# Altium PCB PCB.PcbDoc (part 5 of 6)
Units mm, origin at the board's own origin, x right, y up, seen from the top; angles counter-clockwise.
Board outline 190 x 64 mm, 6 copper layers (SIG 1, GND 1, SIG 2, PWR, GND 2, SIG 3), stack 1.565 mm thick; 489 components, 387 nets, 1828 pads, 1817 vias.
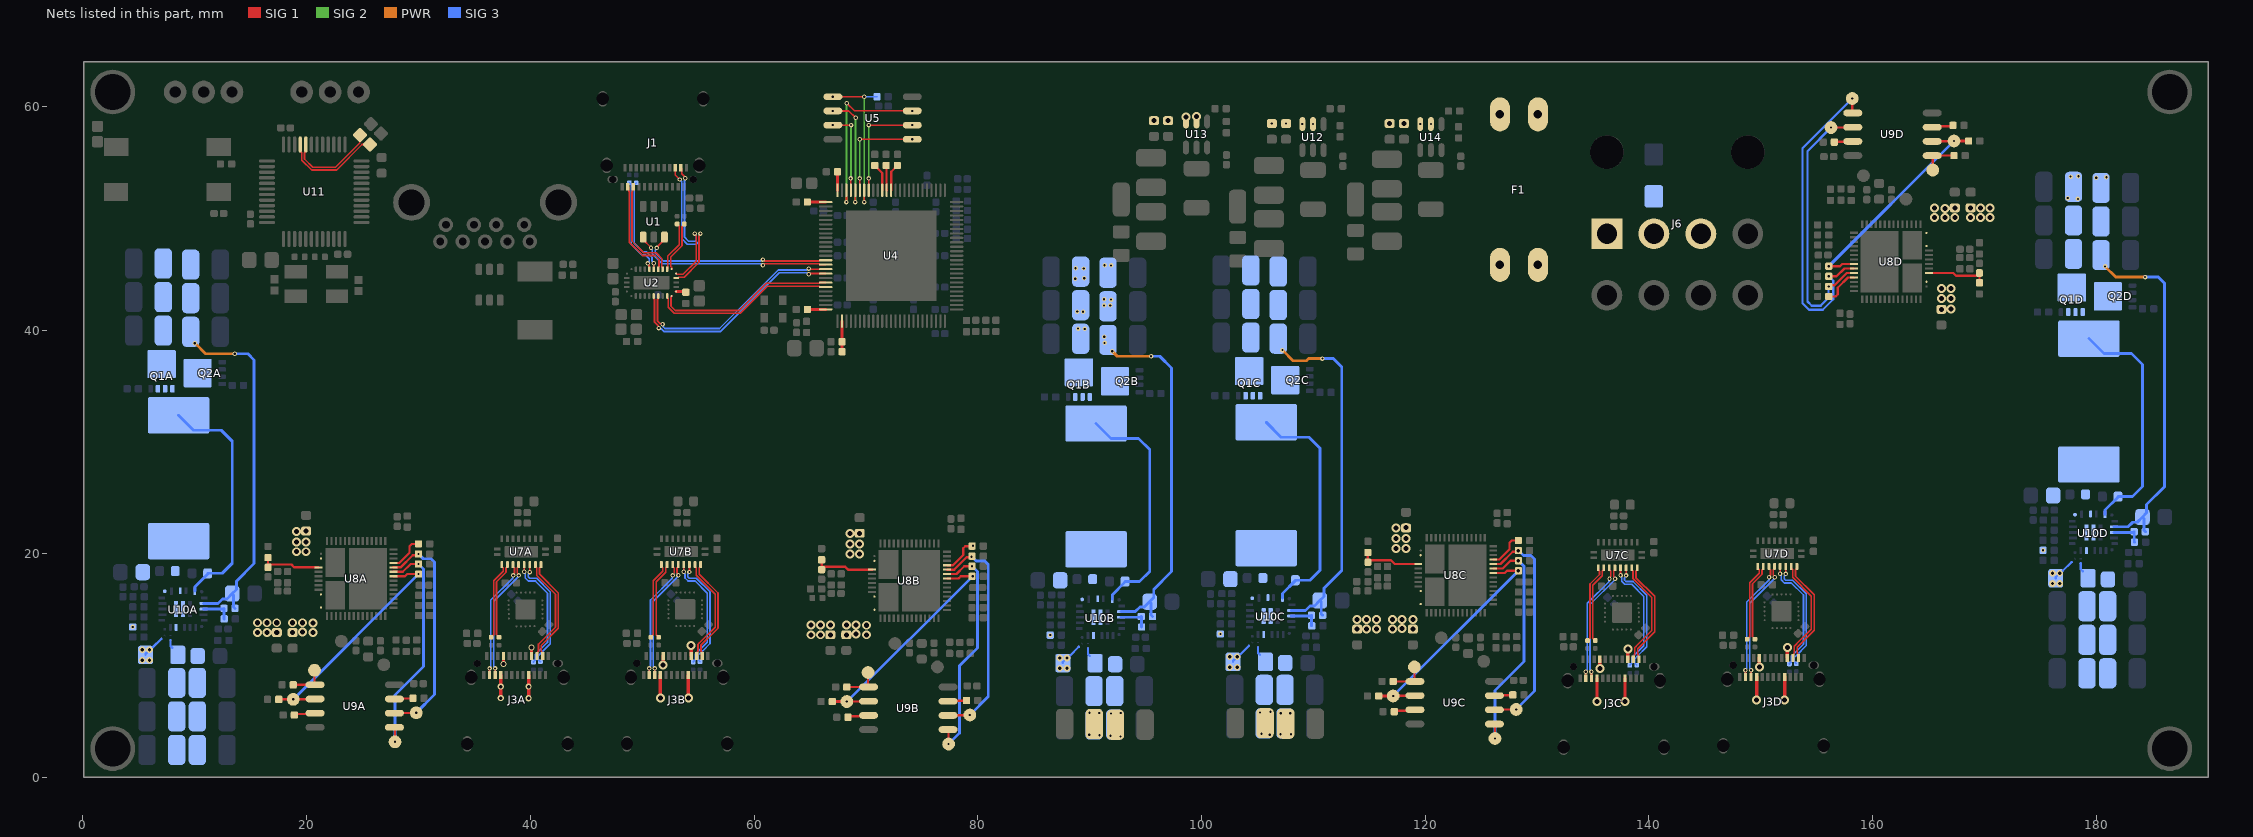
[diagram p9: the nets of this part, all layers, seen from the top]

## Via types
v1: diameter 0.4, hole 0.2, SIG 1 to SIG 3, tented both sides, 1364 vias
v2: diameter 0.6, hole 0.3, SIG 1 to SIG 3, tented both sides, 196 vias
v3: diameter 0.5, hole 0.2, SIG 1 to SIG 3, 130 vias
v4: diameter 0.8, hole 0.45, SIG 1 to SIG 3, tented both sides, 102 vias
v5: diameter 0.5, hole 0.25, SIG 1 to SIG 3, tented both sides, 14 vias
v6: diameter 0.5, hole 0.3, SIG 1 to SIG 3, tented both sides, 5 vias
v7: diameter 0.55, hole 0.3, SIG 1 to SIG 3, tented both sides, 4 vias
v8: diameter 0.55, hole 0.35, SIG 1 to SIG 3, tented both sides, 2 vias

## Nets (pads, with @x,y where several pads share a name; then routed paths per layer and width w, separated by ;. In a path a pad name is that pad's centre, name@x,y a point inside that pad or via, vN(x,y) a via of type N, cw(c..) or ccw(c..) an arc to the next point about the centre after c; other vN are vias at no path point) (continued)
PPHVA: C46A.1 NT1A.2 R60A.2 R61A.1 U8A.11-12 | length 1.7
  SIG 3 w0.203: R60A.2@5.583,10.973 5.583,11.058 v2(5.95,11.425) ; R60A.2@6.223,11.635 NT1A.2@7.013,12.425
  other v1: 4.451,13.472
  other v2: 5.3,10.5 5.95,10.5 5.3,11.425
  other v4: 15.6,12.975 16.45,12.975 17.325,12.975 15.6,13.85 16.45,13.85 17.325,13.85
PPHVB: C46B.1 NT1B.2 R60B.2 R61B.1 U8B.11-12 | length 1.7
  SIG 3 w0.203: R60B.2@87.613,10.243 87.613,10.328 v2(87.98,10.695) ; R60B.2@88.252,10.905 NT1B.2@89.043,11.695
  other v1: 86.481,12.743
  other v2: 87.33,9.77 87.98,9.77 87.33,10.695
  other v4: 65.1,12.775 65.95,12.775 66.825,12.775 65.1,13.65 65.95,13.65 66.825,13.65
PPHVC: C46C.1 NT1C.2 R60C.2 R61C.1 U8C.11-12 | length 1.7
  SIG 3 w0.203: R60C.2@102.831,10.351 102.831,10.435 v2(103.199,10.803) ; R60C.2@103.471,11.012 NT1C.2@104.261,11.802
  other v1: 101.7,12.85
  other v2: 102.549,9.878 103.199,9.878 102.549,10.803
  other v4: 113.933,13.275 114.783,13.275 115.658,13.275 113.933,14.15 114.783,14.15 115.658,14.15
PPHVD: C46D.1 NT1D.2 R60D.2 R61D.1 U8D.11-12 | length 1.7
  SIG 3 w0.203: R60D.2@176.393,17.828 176.393,17.913 v2(176.76,18.28) ; R60D.2@177.033,18.49 NT1D.2@177.823,19.28
  other v1: 175.261,20.328
  other v2: 176.11,17.355 176.76,17.355 176.11,18.28
  other v4: 168.792,50.075 169.667,50.075 170.517,50.075 168.792,50.95 169.667,50.95 170.517,50.95
RBIAS: R17.1 U4.100 | length 1.6
  SIG 1 w0.25: R17.1@64.775,41.869 U4.100@66.411,41.869
REG_VCCA: C69A.1 U10A.19
REG_VCCB: C69B.1 U10B.19
REG_VCCC: C69C.1 U10C.19
REG_VCCD: C69D.1 U10D.19
S_I2C_CLK: R27.1 U4.75 | length 1.7
  SIG 1 w0.25: U4.75@67.462,52.52 R27.1@67.462,54.175
S_I2C_DATA: R30.1 U4.76 | length 1.6
  SIG 1 w0.25: R30.1@64.775,51.469 U4.76@66.411,51.469
SPI_CE_N: R20.1 U4.69 U5.1 | length 14.5
  SIG 1 w0.15: U5.1@67.025,60.91 v1(67.05,60.885) v1(69.862,60.885) ; v1(69.862,51.461) U4.69@69.862,52.52
  SIG 2 w0.15: v1(69.862,51.461) v1(69.862,60.885)
  SIG 3 w0.15: v1(69.862,60.885) R20.1@71,60.885
SPI_CLK: U4.68 U5.6 | length 9.7
  SIG 1 w0.15: U4.68@70.262,52.52 v1(70.262,53.579) ; v1(70.262,58.345) v1(74.15,58.345)
  SIG 2 w0.15: v1(70.262,53.579) v1(70.262,58.345)
SPI_CLKA: R48A.1 TP5A.0 U8A.38 U9A.6 | length 20.6
  SIG 1 w0.203: U8A.38@27.75,18.8 28.4,18.8 29.496,19.896 29.896,19.896 v1(30,20) ; U9A.6@27.85,5.765 27.868,5.783 29.782,5.783 v1(29.8,5.8)
  SIG 3 w0.25: v1(29.8,5.8) 31.425,7.425 31.425,19.276 31.126,19.575 30.425,19.575 v1(30,20)
SPI_CLKB: R48B.1 TP5B.0 U8B.38 U9B.6 | length 20.6
  SIG 1 w0.203: U8B.38@77.25,18.6 77.9,18.6 78.996,19.696 79.396,19.696 v1(79.448,19.748) R48B.1@79.5,19.8 ; U9B.6@77.35,5.565 77.368,5.582 79.282,5.582 v1(79.3,5.6)
  SIG 3 w0.25: v1(79.3,5.6) 80.94,7.24 80.94,19.061 80.635,19.366 79.871,19.366 79.489,19.748 v1(79.448,19.748)
SPI_CLKC: R48C.1 TP5C.0 U8C.38 U9C.6 | length 20.6
  SIG 1 w0.203: U8C.38@126.1,19.1 126.75,19.1 127.846,20.196 128.246,20.196 v6(128.35,20.3) ; U9C.6@126.2,6.065 126.217,6.082 128.132,6.082 v1(128.15,6.1)
  SIG 3 w0.25: v1(128.15,6.1) 129.79,7.74 129.79,19.561 129.476,19.875 128.809,19.875 128.384,20.3 v6(128.35,20.3)
SPI_CLKD: R48D.1 TP5D.0 U8D.38 U9D.6 | length 24.5
  SIG 1 w0.203: v1(156.1,43.925) 156.204,44.029 156.604,44.029 157.7,45.125 U8D.38@158.35,45.125 ; v1(156.3,58.125) 156.318,58.143 158.233,58.142 U9D.6@158.25,58.16
  SIG 3 w0.203: v1(156.1,43.925) 156.075,43.9 156.075,42.9 155.372,42.197 154.578,42.197 154.193,42.582 154.193,56.018 v1(156.3,58.125)
SPI_CSnA: R54A.2 TP3A.0 U9A.1 | length 3.3
  SIG 1 w0.203: R54A.2@18.8,8.3 18.802,8.303 20.747,8.303 U9A.1@20.75,8.305 20.7,8.355 TP3A.0@20.7,9.6
SPI_CSnB: R54B.2 TP3B.0 U9B.1 | length 3.3
  SIG 1 w0.203: R54B.2@68.3,8.1 68.302,8.102 70.247,8.102 U9B.1@70.25,8.105 70.2,8.155 TP3B.0@70.2,9.4
SPI_CSnC: R54C.2 TP3C.0 U9C.1 | length 3.3
  SIG 1 w0.203: R54C.2@117.15,8.6 117.152,8.602 119.097,8.602 U9C.1@119.1,8.605 119.05,8.655 TP3C.0@119.05,9.9
SPI_CSnD: R54D.2 TP3D.0 U9D.1 | length 3.3
  SIG 1 w0.203: TP3D.0@165.4,54.325 165.4,55.57 U9D.1@165.35,55.62 165.353,55.623 167.298,55.622 R54D.2@167.3,55.625
SPI_D0: U4.70 U5.5 | length 9.2
  SIG 1 w0.15: U4.70@69.462,52.52 v1(69.462,53.579) ; v1(69.462,57.075) v1(74.15,57.075)
  SIG 2 w0.15: v1(69.462,53.579) v1(69.462,57.075)
SPI_D1: U4.71 U5.2 | length 10.9
  SIG 1 w0.15: v1(67.05,59.615) 68.485,59.615 v1(69.1,59) ; v1(69.062,51.461) U4.71@69.062,52.52
  SIG 2 w0.15: v1@69.054,51.469 69.081,51.496 69.081,58.981 v1(69.1,59)
SPI_D2: U4.72 U5.3 | length 7.5
  SIG 1 w0.15: v1(67.05,58.345) v1(68.679,58.345) ; v1(68.637,53.579) 68.654,53.562 68.654,52.528 U4.72@68.662,52.52
  SIG 2 w0.15: v1(68.637,53.579) 68.669,53.611 v1@68.669,58.345
SPI_D3: U4.73 U5.7 | length 16
  SIG 1 w0.15: v1(68.262,51.461) U4.73@68.262,52.52 ; v1(68.3,60.3) 68.98,59.62 v1(74.145,59.62)
  SIG 2 w0.15: v1(68.262,51.461) 68.262,60.262 v1(68.3,60.3)
SPI_HOLDA: R55A.2 U9A.7 | length 1.7
  SIG 1 w0.203: U9A.7@27.85,7.035 27.882,7.067 29.467,7.067 R55A.2@29.5,7.1
SPI_HOLDB: R55B.2 U9B.7 | length 1.7
  SIG 1 w0.203: U9B.7@77.35,6.835 77.382,6.867 78.967,6.867 R55B.2@79,6.9
SPI_HOLDC: R55C.2 U9C.7 | length 1.7
  SIG 1 w0.203: U9C.7@126.2,7.335 126.232,7.367 127.817,7.367 R55C.2@127.85,7.4
SPI_HOLDD: R55D.2 U9D.7 | length 1.7
  SIG 1 w0.203: R55D.2@156.6,56.825 156.633,56.858 158.218,56.858 U9D.7@158.25,56.89
SPI_MISOA: R47A.1 R53A.2 TP4A.0 U8A.36 U9A.2 | length 21.4
  SIG 1 w0.203: v1(18.8,7) 18.817,7.017 20.732,7.017 U9A.2@20.75,7.035 ; U8A.36@27.75,18 28.787,18 28.987,18.2 v1(30,18.2)
  SIG 1 w0.25: R53A.2@17.5,7 v1(18.8,7)
  SIG 3 w0.25: v1(18.8,7) v1(30,18.2)
SPI_MISOB: R47B.1 R53B.2 TP4B.0 U8B.36 U9B.2 | length 21.5
  SIG 1 w0.203: v1(68.3,6.8) 68.317,6.817 70.232,6.817 U9B.2@70.25,6.835 ; U8B.36@77.25,17.8 78.287,17.8 78.487,18 R47B.1@79.5,18
  SIG 1 w0.25: R53B.2@67,6.8 v1(68.3,6.8)
  SIG 3 w0.25: v1(68.3,6.8) 68.325,6.8 79.525,18 v1(79.55,18)
SPI_MISOC: R47C.1 R53C.2 TP4C.0 U8C.36 U9C.2 | length 21.4
  SIG 1 w0.203: v1(117.15,7.3) 117.167,7.317 119.082,7.317 U9C.2@119.1,7.335 ; U8C.36@126.1,18.3 127.137,18.3 127.337,18.5 v6(128.35,18.5)
  SIG 1 w0.25: R53C.2@115.85,7.3 v1(117.15,7.3)
  SIG 3 w0.25: v1(117.15,7.3) v6(128.35,18.5)
SPI_MISOD: R47D.1 R53D.2 TP4D.0 U8D.36 U9D.2 | length 21.4
  SIG 1 w0.203: v1(156.1,45.725) 157.113,45.725 157.313,45.925 U8D.36@158.35,45.925 ; U9D.2@165.35,56.89 165.368,56.908 167.283,56.908 v1(167.3,56.925)
  SIG 1 w0.25: v1(167.3,56.925) R53D.2@168.6,56.925
  SIG 3 w0.25: v1(156.1,45.725) v1(167.3,56.925)
SPI_MOSIA: R46A.1 TP6A.0 U8A.37 U9A.5 | length 21
  SIG 1 w0.203: U8A.37@27.75,18.4 28.6,18.4 29.3,19.1 v1(30,19.1) ; U9A.5@27.85,4.495 27.9,4.445 v1(27.9,3.2)
  SIG 3 w0.25: v1(27.9,3.2) 27.9,7.4 30.45,9.95 30.45,18.65 v1(30,19.1)
SPI_MOSIB: R46B.1 TP6B.0 U8B.37 U9B.5 | length 21
  SIG 1 w0.203: U8B.37@77.25,18.2 78.1,18.2 78.8,18.9 v1(79.5,18.9) ; U9B.5@77.35,4.295 77.4,4.245 v1(77.4,3)
  SIG 3 w0.25: v1(77.4,3) 78.375,3.975 78.375,10 79.975,11.6 79.975,18.425 v1(79.5,18.9)
SPI_MOSIC: R46C.1 TP6C.0 U8C.37 U9C.5 | length 21
  SIG 1 w0.203: U8C.37@126.1,18.7 126.95,18.7 127.65,19.4 v6(128.35,19.4) ; U9C.5@126.2,4.795 126.25,4.745 v1(126.25,3.5)
  SIG 3 w0.25: v1(126.25,3.5) 126.25,7.8 128.85,10.4 128.85,18.9 v6(128.35,19.4)
SPI_MOSID: R46D.1 TP6D.0 U8D.37 U9D.5 | length 29.6
  SIG 1 w0.203: v1(156.1,44.825) 156.8,44.825 157.5,45.525 U8D.37@158.35,45.525 ; v1(158.2,60.725) 158.2,59.48 U9D.5@158.25,59.43
  SIG 3 w0.203: v1(156.1,44.825) 156.502,44.423 156.502,42.777 155.559,41.834 154.341,41.834 153.75,42.425 153.75,56.275 v1(158.2,60.725)
SPI_SSA: R45A.1 U8A.39 | length 3.3
  SIG 1 w0.203: U8A.39@27.75,19.2 27.752,19.202 28.287,19.202 29.2,20.115 29.2,20.7 29.4,20.9 R45A.1@30,20.9
SPI_SSB: R45B.1 U8B.39 | length 3.3
  SIG 1 w0.203: U8B.39@77.25,19 77.252,19.002 77.787,19.002 78.7,19.915 78.7,20.5 78.9,20.7 R45B.1@79.5,20.7
  other v1: 79.575,20.725
SPI_SSC: R45C.1 U8C.39 | length 3.3
  SIG 1 w0.203: U8C.39@126.1,19.5 126.102,19.502 126.637,19.502 127.55,20.415 127.55,21 127.75,21.2 R45C.1@128.35,21.2
SPI_SSD: R45D.1 U8D.39 | length 3.3
  SIG 1 w0.203: R45D.1@156.1,43.025 156.7,43.025 156.9,43.225 156.9,43.81 157.813,44.723 158.348,44.723 U8D.39@158.35,44.725
SPI_WPA: R52A.2 U9A.3 | length 1.9
  SIG 1 w0.203: R52A.2@18.9,5.6 18.989,5.689 20.674,5.689 U9A.3@20.75,5.765
SPI_WPB: R52B.2 U9B.3 | length 1.9
  SIG 1 w0.203: R52B.2@68.4,5.4 68.489,5.489 70.174,5.489 U9B.3@70.25,5.565
SPI_WPC: R52C.2 U9C.3 | length 1.9
  SIG 1 w0.203: R52C.2@117.25,5.9 117.339,5.989 119.024,5.989 U9C.3@119.1,6.065
SPI_WPD: R52D.2 U9D.3 | length 1.9
  SIG 1 w0.203: U9D.3@165.35,58.16 165.426,58.236 167.111,58.236 R52D.2@167.2,58.325
ST_USB2_D_N: R79.2 U11.32 | length 8.2
  SIG 1 w0.152: U11.32@19.925,56.614 19.925,56.001 19.8,55.876 19.8,55.318 20.542,54.575 22.575,54.575 24.753,56.753 24.753,57.453 R79.2@24.766,57.466
ST_USB2_D_P: R80.2 U11.33 | length 8.9
  SIG 1 w0.152: U11.33@19.425,56.614 19.425,56.008 19.558,55.876 19.558,55.217 20.442,54.333 22.676,54.333 24.949,56.606 25.656,56.606 R80.2@25.666,56.616
SW1A: C60A.2 L1A.1 Q1A.1 Q1A.2 Q1A.3 Q2A.5-6-7-8 U10A.23 | length 21.3
  SIG 3 w0.254: L1A.1@8.551,32.397 9.887,31.062 12.362,31.062 13.351,30.072 13.351,19.172 12.451,18.272 C60A.2@11.151,18.272 11.151,18.222 10.003,17.074 10.003,16.687 U10A.23@10.001,16.685
SW1B: C60B.2 L1B.1 Q1B.1 Q1B.2 Q1B.3 Q2B.5-6-7-8 U10B.23 | length 21.3
  SIG 3 w0.254: L1B.1@90.581,31.668 91.917,30.332 94.392,30.332 95.381,29.343 95.381,18.443 94.481,17.543 C60B.2@93.181,17.543 93.181,17.493 92.033,16.345 92.033,15.957 U10B.23@92.031,15.955
SW1C: C60C.2 L1C.1 Q1C.1 Q1C.2 Q1C.3 Q2C.5-6-7-8 U10C.23 | length 21.3
  SIG 3 w0.254: L1C.1@105.8,31.775 107.136,30.439 109.611,30.439 110.6,29.45 110.6,18.55 109.7,17.65 C60C.2@108.4,17.65 108.4,17.6 107.252,16.452 107.252,16.064 U10C.23@107.25,16.063
SW1D: C60D.2 L1D.1 Q1D.1 Q1D.2 Q1D.3 Q2D.5-6-7-8 U10D.23 | length 21.3
  SIG 3 w0.254: L1D.1@179.361,39.253 180.697,37.917 183.172,37.917 184.161,36.928 184.161,26.028 183.261,25.128 C60D.2@181.961,25.128 181.961,25.078 180.813,23.93 180.813,23.542 U10D.23@180.811,23.54
SW2A: C61A.2 L1A.2 U10A.21 U10A.25
SW2B: C61B.2 L1B.2 U10B.21 U10B.25
SW2C: C61C.2 L1C.2 U10C.21 U10C.25
SW2D: C61D.2 L1D.2 U10D.21 U10D.25
TEST1: R24.1 U4.63 | length 2.4
  SIG 1 w0.203: U4.63@72.262,52.52 72.262,54.168 R24.1@72.826,54.732
TEST2: R25.1 U4.64 | length 2.2
  SIG 1 w0.203: R25.1@71.81,54.732 71.857,54.685 71.857,52.526 U4.64@71.862,52.52
TEST3: R26.1 U4.65 | length 2.5
  SIG 1 w0.203: R26.1@70.794,54.73 71.462,54.062 U4.65@71.462,52.52
UFP_DIR: R1.1 U2.11 | length 0.9
  SIG 1 w0.25: U2.11@53.036,43.469 53.831,43.469 R1.1@53.9,43.4
UP_USB2_N: U1.1 U4.90 | length 17.8
  SIG 1 w0.152: U1.1@50.089,48.33 50.089,48.105 50.789,47.405 v1(50.789,47.381) ; v1(60.8,45.825) 60.923,45.948 63.171,45.948 63.177,45.942 65.818,45.942 65.891,45.869 U4.90@66.411,45.869
  SIG 3 w0.152: v1(50.789,47.381) 50.789,47.314 50.908,47.194 50.908,46.831 51.791,45.948 60.61,45.948 60.733,45.825 v1(60.8,45.825)
UP_USB2_P: U1.3 U4.89 | length 17.4
  SIG 1 w0.152: v1(51.305,47.365) 51.305,47.421 51.989,48.105 U1.3@51.989,48.33 ; v1(60.8,46.325) 60.923,46.202 63.276,46.202 63.282,46.196 65.818,46.196 65.891,46.269 U4.89@66.411,46.269
  SIG 3 w0.152: v1(51.305,47.365) 51.305,47.298 51.162,47.155 51.162,46.936 51.896,46.202 60.61,46.202 60.733,46.325 v1(60.8,46.325)
UP_USB3_RX_N: U2.10 U4.94 | length 16
  SIG 1 w0.152: U2.10@52.636,43.069 52.633,43.069 52.575,43.011 52.575,42.163 52.963,41.775 58.673,41.775 61.094,44.196 65.818,44.196 65.891,44.269 U4.94@66.411,44.269
UP_USB3_RX_P: U2.9 U4.95 | length 16.4
  SIG 1 w0.152: U2.9@52.236,43.069 52.236,42.919 52.321,42.834 52.321,42.058 52.858,41.521 58.778,41.521 61.199,43.942 65.818,43.942 65.891,43.869 U4.95@66.411,43.869
UP_USB3_TX_N: U2.7 U4.91 | length 19.7
  SIG 1 w0.152: U2.7@51.436,43.069 51.412,43.045 51.412,42.801 51.363,42.752 51.363,40.838 51.604,40.597 ; v1(64.9,45.519) 64.95,45.469 U4.91@66.411,45.469
  SIG 3 w0.152: v1(51.825,40.55) 51.872,40.503 51.872,40.329 52.047,40.154 56.92,40.154 62.013,45.247 62.162,45.396 64.71,45.396 64.833,45.519 v1(64.9,45.519)
UP_USB3_TX_P: U2.6 U4.92 | length 20.1
  SIG 1 w0.152: U2.6@51.036,43.069 51.06,43.045 51.06,42.801 51.109,42.752 51.109,40.733 51.424,40.418 ; v1(64.9,45.019) 64.95,45.069 U4.92@66.411,45.069
  SIG 3 w0.152: v1(51.471,40.196) 51.519,40.149 51.693,40.149 51.942,39.9 57.025,39.9 62.267,45.142 64.71,45.142 64.833,45.019 v1(64.9,45.019)
USB3_RX1_N: J1.B10 U2.14 | length 14.4
  SIG 1 w0.152: J1.B10@52.963,54.533 52.963,53.884 v1(53.364,53.483) ; U2.14@53.036,44.669 53.186,44.669 53.264,44.747 53.757,44.747 55.083,46.073 55.083,48.463 55.206,48.586 v1(55.206,48.653)
  SIG 3 w0.152: v1(53.364,53.483) 53.364,53.445 53.538,53.27 53.538,48.202 54.038,47.703 54.839,47.703 55.083,47.946 55.083,48.463 55.206,48.586 v1(55.206,48.653)
USB3_RX1_P: J1.B11 U2.15 | length 13.1
  SIG 1 w0.152: U2.15@53.036,45.069 53.036,45.062 53.08,45.017 53.08,45.001 53.651,45.001 54.829,46.179 54.829,48.454 54.7,48.583 v1(54.7,48.65) ; J1.B11@53.463,54.533 53.537,54.459 53.537,53.998 53.85,53.684 v1(53.85,53.6)
  SIG 3 w0.152: v1(53.85,53.6) 53.803,53.553 53.803,53.397 53.792,53.387 53.792,48.308 54.143,47.957 54.734,47.957 54.829,48.052 54.829,48.454 54.7,48.583 v1(54.7,48.65)
USB3_RX1A_N: J3A.B10 U7A.15 | length 10.7
  SIG 1 w0.152: J3A.B10@36.85,9.175 v1(36.85,9.76) ; 38.842,18.269 38.842,18.767 38.95,18.875 U7A.15@38.95,19.05
  SIG 3 w0.152: v1(36.85,9.76) 36.85,9.827 36.727,9.95 36.727,15.773 38.965,18.011 v1(38.965,18.078)
USB3_RX1A_P: J3A.B11 U7A.14 | length 10.6
  SIG 1 w0.152: J3A.B11@36.35,9.175 v1(36.35,9.76) ; U7A.14@38.45,19.05 38.45,18.875 38.588,18.737 38.588,18.267
  SIG 3 w0.152: v1(36.35,9.76) 36.35,9.827 36.473,9.95 36.473,15.878 38.418,17.823 38.418,18.03 v1(38.465,18.077)
USB3_RX1B_N: J3B.B10 U7B.15 | length 10.7
  SIG 1 w0.152: J3B.B10@51.125,9.183 v1(51.125,9.769) ; 53.117,18.277 53.117,18.775 53.225,18.883 U7B.15@53.225,19.058
  SIG 3 w0.152: v1(51.125,9.769) 51.125,9.836 51.002,9.959 51.002,15.781 53.24,18.019 v1(53.24,18.086)
USB3_RX1B_P: J3B.B11 U7B.14 | length 10.6
  SIG 1 w0.152: J3B.B11@50.625,9.183 v1(50.625,9.769) ; U7B.14@52.725,19.058 52.725,18.883 52.863,18.746 52.863,18.275
  SIG 3 w0.152: v1(50.625,9.769) 50.625,9.836 50.748,9.959 50.748,15.886 52.693,17.831 52.693,18.038 v1(52.74,18.085)
USB3_RX1C_N: J3C.B10 U7C.15 | length 10.7
  SIG 1 w0.152: J3C.B10@134.88,8.88 v1(134.88,9.466) ; 136.872,17.974 136.872,18.472 136.98,18.58 U7C.15@136.98,18.755
  SIG 3 w0.152: v1(134.88,9.466) 134.88,9.533 134.757,9.656 134.757,15.478 136.996,17.716 v1(136.996,17.783)
USB3_RX1C_P: J3C.B11 U7C.14 | length 10.6
  SIG 1 w0.152: J3C.B11@134.38,8.88 v1(134.38,9.466) ; U7C.14@136.48,18.755 136.48,18.58 136.618,18.443 136.618,17.972
  SIG 3 w0.152: v1(134.38,9.466) 134.38,9.533 134.503,9.656 134.503,15.583 136.448,17.528 136.448,17.735 v1(136.496,17.783)
USB3_RX1D_N: J3D.B10 U7D.15 | length 10.7
  SIG 1 w0.152: J3D.B10@149.15,9.008 v1(149.15,9.594) ; 151.142,18.102 151.142,18.6 151.25,18.708 U7D.15@151.25,18.883
  SIG 3 w0.152: v1(149.15,9.594) 149.15,9.661 149.027,9.784 149.027,15.606 151.265,17.844 v1(151.265,17.911)
USB3_RX1D_P: J3D.B11 U7D.14 | length 10.6
  SIG 1 w0.152: J3D.B11@148.65,9.008 v1(148.65,9.594) ; U7D.14@150.75,18.883 150.75,18.708 150.888,18.571 150.888,18.1
  SIG 3 w0.152: v1(148.65,9.594) 148.65,9.661 148.773,9.784 148.773,15.711 150.765,17.703 v1(150.765,17.91)
USB3_RX2_N: J1.A10 U2.18 | length 9.2
  SIG 1 w0.152: J1.A10@49.213,52.833 49.139,52.759 49.139,52.436 49.09,52.387 49.09,47.987 50.141,46.936 51.246,46.936 51.763,46.419 51.763,46.349 51.763,45.692 51.836,45.619 U2.18@51.836,45.469
USB3_RX2_P: J1.A11 U2.19 | length 9.2
  SIG 1 w0.152: J1.A11@48.713,52.833 48.787,52.759 48.787,52.436 48.836,52.387 48.836,47.882 50.036,46.682 51.141,46.682 51.509,46.314 51.509,46.244 51.509,45.692 51.436,45.619 U2.19@51.436,45.469
USB3_RX2A_N: J3A.A10 U7A.18 | length 9.6
  SIG 1 w0.152: U7A.18@40.45,19.05 40.45,18.875 40.573,18.752 40.573,18.074 42.247,16.4 42.247,13.449 40.921,12.123 40.797,12 40.723,11.925 40.723,11.321 40.674,11.272 40.674,10.949 J3A.A10@40.6,10.875
USB3_RX2A_P: J3A.A11 U7A.19 | length 9.6
  SIG 1 w0.152: U7A.19@40.95,19.05 40.95,18.875 40.827,18.752 40.827,18.179 42.501,16.506 42.501,13.344 40.977,11.82 40.977,11.321 41.026,11.272 41.026,10.949 J3A.A11@41.1,10.875
USB3_RX2B_N: J3B.A10 U7B.18 | length 9.6
  SIG 1 w0.152: U7B.18@54.725,19.058 54.725,18.883 54.848,18.76 54.848,18.082 56.522,16.409 56.522,13.457 55.196,12.131 55.072,12.008 54.998,11.933 54.998,11.329 54.949,11.28 54.949,10.957 J3B.A10@54.875,10.883
USB3_RX2B_P: J3B.A11 U7B.19 | length 9.6
  SIG 1 w0.152: U7B.19@55.225,19.058 55.225,18.883 55.102,18.76 55.102,18.188 56.776,16.514 56.776,13.352 55.252,11.828 55.252,11.329 55.301,11.28 55.301,10.957 J3B.A11@55.375,10.883
USB3_RX2C_N: J3C.A10 U7C.18 | length 9.6
  SIG 1 w0.152: U7C.18@138.48,18.755 138.48,18.58 138.603,18.457 138.603,17.78 140.277,16.106 140.277,13.154 138.951,11.829 138.828,11.705 138.753,11.631 138.753,11.027 138.704,10.978 138.704,10.654 J3C.A10@138.63,10.58
USB3_RX2C_P: J3C.A11 U7C.19 | length 9.6
  SIG 1 w0.152: U7C.19@138.98,18.755 138.98,18.58 138.857,18.457 138.857,17.885 140.531,16.211 140.531,13.049 139.007,11.525 139.007,11.027 139.057,10.978 139.057,10.654 J3C.A11@139.13,10.58
USB3_RX2D_N: J3D.A10 U7D.18 | length 9.6
  SIG 1 w0.152: U7D.18@152.75,18.883 152.75,18.708 152.873,18.585 152.873,17.907 154.547,16.234 154.547,13.282 153.221,11.956 153.097,11.833 153.023,11.758 153.023,11.154 152.974,11.105 152.974,10.782 J3D.A10@152.9,10.708
USB3_RX2D_P: J3D.A11 U7D.19 | length 9.6
  SIG 1 w0.152: U7D.19@153.25,18.883 153.25,18.708 153.127,18.585 153.127,18.013 154.801,16.339 154.801,13.177 153.277,11.653 153.277,11.154 153.326,11.105 153.326,10.782 J3D.A11@153.4,10.708
USB3_TX1_N: C4.1 U2.17 | length 4.6
  SIG 1 w0.152: U2.17@52.236,45.469 52.26,45.493 52.26,45.701 52.29,45.732 52.29,46.638 53.312,47.66 53.312,49.301 53.122,49.491 C4.1@53.122,49.507
USB3_TX1_P: C3.1 U2.16 | length 4.6
  SIG 1 w0.152: U2.16@52.636,45.469 52.636,45.633 52.565,45.704 52.565,46.554 53.566,47.555 53.566,49.301 53.757,49.491 C3.1@53.757,49.507
USB3_TX1A_N: C35A.2 U7A.13 | length 7
  SIG 1 w0.152: C35A.2@37.2,12.55 36.977,12.773 36.977,17.502 37.827,18.352 37.827,18.752 37.95,18.875 U7A.13@37.95,19.05
USB3_TX1A_P: C34A.2 U7A.12 | length 7
  SIG 1 w0.152: C34A.2@36.5,12.55 36.723,12.773 36.723,17.607 37.573,18.457 37.573,18.752 37.45,18.875 U7A.12@37.45,19.05
USB3_TX1B_N: C35B.2 U7B.13 | length 7
  SIG 1 w0.152: C35B.2@51.475,12.558 51.252,12.781 51.252,17.51 52.102,18.36 52.102,18.76 52.225,18.883 U7B.13@52.225,19.058
USB3_TX1B_P: C34B.2 U7B.12 | length 7
  SIG 1 w0.152: C34B.2@50.775,12.558 50.998,12.781 50.998,17.615 51.848,18.465 51.848,18.76 51.725,18.883 U7B.12@51.725,19.058
USB3_TX1C_N: C35C.2 U7C.13 | length 7
  SIG 1 w0.152: C35C.2@135.23,12.255 135.007,12.479 135.007,17.207 135.857,18.057 135.857,18.457 135.98,18.58 U7C.13@135.98,18.755
USB3_TX1C_P: C34C.2 U7C.12 | length 7
  SIG 1 w0.152: C34C.2@134.53,12.255 134.753,12.479 134.753,17.313 135.603,18.163 135.603,18.457 135.48,18.58 U7C.12@135.48,18.755
USB3_TX1D_N: C35D.2 U7D.13 | length 7
  SIG 1 w0.152: C35D.2@149.5,12.383 149.277,12.606 149.277,17.335 150.127,18.185 150.127,18.585 150.25,18.708 U7D.13@150.25,18.883
USB3_TX1D_P: C34D.2 U7D.12 | length 7
  SIG 1 w0.152: C34D.2@148.8,12.383 149.023,12.606 149.023,17.44 149.873,18.29 149.873,18.585 149.75,18.708 U7D.12@149.75,18.883
USB3_TX2_N: C6.1 U2.20 | length 8.7
  SIG 1 w0.152: v1(51.033,45.987) v1(51.033,45.987) 51.035,45.47 U2.20@51.036,45.469
  SIG 3 w0.152: C6.1@49.467,53.188 49.467,53.172 49.283,52.988 49.283,47.794 49.616,47.462 49.855,47.222 50.07,47.007 50.388,47.007 50.886,46.508 50.886,46.2 51.033,46.053 v1(51.033,45.987)
USB3_TX2_P: C5.1 U2.21 | length 8.5
  SIG 1 w0.152: 50.612,45.8 50.612,45.493 U2.21@50.636,45.469
  SIG 3 w0.152: C5.1@48.848,53.196 48.848,53.18 49.029,52.999 49.029,47.689 49.436,47.282 49.965,46.753 50.283,46.753 50.632,46.403 50.632,46.17 50.504,46.042 v1(50.504,45.975)
USB3_TX2A_N: C37A.2 U7A.16 | length 10.5
  SIG 1 w0.152: v1(39.45,18.4) U7A.16@39.45,19.05
  SIG 3 w0.152: v1(39.45,18.4) 39.45,18.333 39.558,18.225 39.558,17.846 39.829,17.574 40.458,17.574 41.538,16.494 41.538,12.091 40.824,11.377 40.461,11.014 40.461,10.527 40.282,10.348 C37A.2@40.282,10.332
USB3_TX2A_P: C36A.2 U7A.17 | length 10.5
  SIG 1 w0.152: v1(39.95,18.38) U7A.17@39.95,19.05
  SIG 3 w0.152: v1(39.95,18.38) 39.95,18.313 39.812,18.175 39.812,17.951 39.935,17.828 40.563,17.828 41.792,16.599 41.792,11.986 40.93,11.123 40.715,10.909 40.715,10.55 40.9,10.366 C36A.2@40.9,10.35
USB3_TX2B_N: C37B.2 U7B.16 | length 10.5
  SIG 1 w0.152: v1(53.725,18.408) U7B.16@53.725,19.058
  SIG 3 w0.152: v1(53.725,18.408) 53.725,18.341 53.833,18.234 53.833,17.854 54.104,17.582 54.733,17.582 55.813,16.502 55.813,12.099 55.298,11.583 55.099,11.385 54.736,11.022 54.736,10.535 54.557,10.356 C37B.2@54.557,10.341
USB3_TX2B_P: C36B.2 U7B.17 | length 10.5
  SIG 1 w0.152: v1(54.225,18.388) U7B.17@54.225,19.058
  SIG 3 w0.152: v1(54.225,18.388) 54.225,18.321 54.087,18.183 54.087,17.959 54.21,17.836 54.838,17.836 56.067,16.607 56.067,11.994 55.403,11.329 55.205,11.131 54.99,10.917 54.99,10.558 55.175,10.374 C36B.2@55.175,10.358
USB3_TX2C_N: C37C.2 U7C.16 | length 10.5
  SIG 1 w0.152: v1(137.48,18.105) U7C.16@137.48,18.755
  SIG 3 w0.152: v1(137.48,18.105) 137.48,18.038 137.588,17.931 137.588,17.551 137.86,17.28 138.488,17.28 139.569,16.199 139.569,11.796 138.855,11.082 138.492,10.719 138.492,10.233 138.313,10.053 C37C.2@138.313,10.038
USB3_TX2C_P: C36C.2 U7C.17 | length 10.5
  SIG 1 w0.152: v1(137.98,18.085) U7C.17@137.98,18.755
  SIG 3 w0.152: v1(137.98,18.085) 137.98,18.018 137.842,17.88 137.842,17.657 137.965,17.534 138.594,17.534 139.823,16.304 139.823,11.691 138.96,10.828 138.746,10.614 138.746,10.256 138.93,10.071 C36C.2@138.93,10.055
USB3_TX2D_N: C37D.2 U7D.16 | length 10.5
  SIG 1 w0.152: v1(151.75,18.233) U7D.16@151.75,18.883
  SIG 3 w0.152: v1(151.75,18.233) 151.75,18.166 151.858,18.059 151.858,17.679 152.129,17.407 152.758,17.407 153.838,16.327 153.838,11.924 153.124,11.21 152.761,10.847 152.761,10.36 152.582,10.181 C37D.2@152.582,10.166
USB3_TX2D_P: C36D.2 U7D.17 | length 10.5
  SIG 1 w0.152: v1@152.25,18.213 U7D.17@152.25,18.883
  SIG 3 w0.152: v1(152.25,18.213) 152.25,18.146 152.112,18.008 152.112,17.784 152.235,17.661 152.863,17.661 154.092,16.432 154.092,11.819 153.23,10.956 153.015,10.742 153.015,10.383 153.2,10.199 C36D.2@153.2,10.183
UVLOA: R56A.2 R59A.1 U10A.4 | length 2.8
  SIG 3 w0.254: U10A.4@10.789,15.072 10.791,15.074 12.537,15.074 R56A.2@12.599,15.136 12.612,15.124 12.612,14.209 R59A.1@12.625,14.197
UVLOB: R56B.2 R59B.1 U10B.4 | length 2.8
  SIG 3 w0.254: U10B.4@92.819,14.343 92.821,14.345 94.567,14.345 R56B.2@94.629,14.407 94.642,14.394 94.642,13.48 R59B.1@94.654,13.467
UVLOC: R56C.2 R59C.1 U10C.4 | length 2.8
  SIG 3 w0.254: U10C.4@108.038,14.45 108.039,14.452 109.786,14.452 R56C.2@109.848,14.514 109.861,14.501 109.861,13.587 R59C.1@109.873,13.574
UVLOD: R56D.2 R59D.1 U10D.4 | length 2.8
  SIG 3 w0.254: U10D.4@181.599,21.928 181.601,21.93 183.347,21.93 R56D.2@183.409,21.992 183.422,21.979 183.422,21.065 R59D.1@183.435,21.052
VBUS_MON_UP: R15.2 R16.2 U4.2 | length 2.7
  SIG 1 w0.25: U4.2@67.862,40.818 67.869,40.811 67.869,38.985 R16.2@67.875,38.979 R15.2@67.875,38.089
VBUSA: C47A.1 C48A.1 J3A.A4 J3A.A9 J3A.B4 J3A.B9 U8A.3-4 U8A.13-14 | length 5.6
  SIG 1 w0.3: v7(37.35,7.108) J3A.B9@37.35,9.175 ; v8(37.6,10.175) J3A.A4@37.6,10.875 ; v7(39.85,7.1) J3A.B4@39.85,9.175 ; J3A.A9@40.1,10.875 v8(40.1,11.65)
  other v4: 18.75,12.975 20.575,12.975 19.625,13.025 20.575,13.825 18.75,13.85 19.625,13.85 19.075,20.2 19.95,20.2 19.075,21.075 19.95,21.075 19.075,22.025 19.95,22.05
  other v7: 39.85,8.137 37.35,8.142
VBUSB: C47B.1 C48B.1 J3B.A4 J3B.A9 J3B.B4 J3B.B9 U8B.3-4 U8B.13-14 | length 5.9
  SIG 1 w0.3: v4(51.625,7.116) J3B.B9@51.625,9.183 ; v4@51.875,10.016 J3B.A4@51.875,10.883 ; v4(54.125,7.108) J3B.B4@54.125,9.183 ; J3B.A9@54.375,10.883 v4(54.375,11.808)
  other v4: 51.875,10.066 68.25,12.775 70.075,12.775 69.125,12.825 70.075,13.625 68.25,13.65 69.125,13.65 68.575,20 69.45,20 68.575,20.875 69.45,20.875 68.575,21.825 69.45,21.85
VBUSC: C47C.1 C48C.1 J3C.A4 J3C.A9 J3C.B4 J3C.B9 U8C.3-4 U8C.13-14 | length 5.9
  SIG 1 w0.3: v4(135.38,6.814) J3C.B9@135.38,8.88 ; v4@135.63,9.714 J3C.A4@135.63,10.58 ; v4(137.88,6.805) J3C.B4@137.88,8.88 ; J3C.A9@138.13,10.58 v4(138.13,11.505)
  other v4: 135.63,9.764 117.083,13.275 118.908,13.275 117.958,13.325 118.908,14.125 117.083,14.15 117.958,14.15 117.408,20.5 118.283,20.5 117.408,21.375 118.283,21.375 117.408,22.325 118.283,22.35
VBUSD: C47D.1 C48D.1 J3D.A4 J3D.A9 J3D.B4 J3D.B9 U8D.3-4 U8D.13-14 | length 5.9
  SIG 1 w0.3: v4(149.65,6.941) J3D.B9@149.65,9.008 ; v4(149.9,9.891) J3D.A4@149.9,10.708 ; v4(152.15,6.933) J3D.B4@152.15,9.008 ; J3D.A9@152.4,10.708 v4(152.4,11.633)
  other v4: 166.167,41.875 167.042,41.9 166.167,42.85 167.042,42.85 166.167,43.725 167.042,43.725 166.492,50.075 167.367,50.075 165.542,50.1 166.492,50.9 165.542,50.95 167.367,50.95
VIN: C53A.1 C53B.1 C53C.1 C53D.1 C54A.1 C54B.1 C54C.1 C54D.1 C55A.1 C55B.1 C55C.1 C55D.1 C56A.1 C56B.1 C56C.1 C56D.1 C57A.1 C57B.1 C57C.1 C57D.1 C58A.1 C58B.1 C58C.1 C58D.1 C59A.1 C59B.1 C59C.1 C59D.1 C83.1 C84.1 C88.1 C89.1 C93.1 C94.1 F1.2 Q1A.5-6-7-8 Q1B.5-6-7-8 Q1C.5-6-7-8 Q1D.5-6-7-8 R56A.1 R56B.1 R56C.1 R56D.1 U10A.3 U10B.3 U10C.3 U10D.3 U12.2 U12.3 U13.2 U13.3 U14.2 U14.3 | length 128.1
  PWR w0.254: v1(10,38.85) 10.95,37.9 v1(13.575,37.9) ; v1(92.03,38.12) 92.475,37.675 v1(95.5,37.675) ; v1(107.249,38.228) 108.199,37.278 109.392,37.278 109.591,37.476 v1(110.824,37.476) ; v1(180.81,45.705) 181.76,44.755 v1(184.385,44.755)
  SIG 3 w0.254: U10A.3@10.789,15.572 12.062,15.572 12.471,15.982 12.868,15.982 C53A.1@13.344,16.457 ; v1(13.575,37.9) 14.75,37.9 15.3,37.35 15.3,19.15 13.713,17.563 13.713,16.827 C53A.1@13.344,16.457 ; R56A.1@13.599,15.136 13.471,15.264 13.471,16.33 C53A.1@13.344,16.457 ; U10B.3@92.819,14.843 94.092,14.843 94.501,15.252 94.898,15.252 C53B.1@95.374,15.728 ; v1(95.5,37.675) 96.275,37.675 97.33,36.62 97.33,18.42 95.743,16.834 95.743,16.097 C53B.1@95.374,15.728 ; R56B.1@95.629,14.407 95.501,14.534 95.501,15.6 C53B.1@95.374,15.728 ; U10C.3@108.038,14.95 109.311,14.95 109.72,15.359 110.117,15.359 C53C.1@110.592,15.835 ; v1(110.824,37.476) 111.8,37.476 112.549,36.728 112.549,18.528 110.962,16.941 110.962,16.204 C53C.1@110.592,15.835 ; R56C.1@110.848,14.514 110.72,14.642 110.72,15.707 C53C.1@110.592,15.835 ; U10D.3@181.599,22.428 182.872,22.428 183.281,22.837 183.678,22.837 C53D.1@184.154,23.313 ; v1(184.385,44.755) 185.56,44.755 186.11,44.205 186.11,26.005 184.523,24.419 184.523,23.682 C53D.1@184.154,23.313 ; R56D.1@184.409,21.992 184.282,22.12 184.282,23.185 C53D.1@184.154,23.313
  other v1: 91.35,38.875 91.325,39.425 89.575,40.125 88.975,40.15 89.425,41.65 88.9,41.675 91.3,42.225 91.85,42.225 91.925,42.75 91.3,42.775 88.725,44.6 89.525,44.65 89.475,45.525 88.75,45.55 91.925,45.8 91.35,45.825 178.375,51.75 177.475,51.825 180.025,53.65 180.925,53.675 177.725,53.75 178.425,53.775 109.032,58.442 109.982,58.442 119.573,58.442 120.523,58.442 106.299,58.485 107.569,58.485
  other v4: 116.84,58.485 118.11,58.485 95.758,58.739 97.028,58.739 98.625,59.075 99.575,59.1
VIN3V3A: C43A.1 R38A.2 U8A.5 | length 5.5
  SIG 1 w0.203: R38A.2@16.545,19.675 16.547,19.672 C43A.1@16.547,19.05 ; C43A.1@16.55,18.805 16.547,18.807 C43A.1@16.547,19.05 ; U8A.5@21.067,18.8 18.896,18.8 18.646,19.05 C43A.1@16.547,19.05
VIN3V3B: C43B.1 R38B.2 U8B.5 | length 5.5
  SIG 1 w0.203: R38B.2@66.045,19.475 66.047,19.472 C43B.1@66.047,18.85 ; C43B.1@66.05,18.605 66.047,18.607 C43B.1@66.047,18.85 ; U8B.5@70.567,18.6 68.396,18.6 68.146,18.85 C43B.1@66.047,18.85
VIN3V3C: C43C.1 R38C.2 U8C.5 | length 5.4
  SIG 1 w0.203: R38C.2@114.878,19.975 114.88,19.972 C43C.1@114.88,19.35 ; C43C.1@114.9,19.259 115.091,19.45 116.942,19.45 117.172,19.221 117.172,19.219 117.291,19.1 U8C.5@119.4,19.1
VIN3V3D: C43D.1 R38D.2 U8D.5 | length 5.5
  SIG 1 w0.203: U8D.5@165.05,45.125 167.221,45.125 167.471,44.875 C43D.1@169.57,44.875 ; C43D.1@169.567,45.12 169.57,45.118 C43D.1@169.57,44.875 ; R38D.2@169.572,44.25 169.57,44.253 C43D.1@169.57,44.875
VINUP: D1.1 F1.1 J6.1 J6.2 J6.3
VOUTA: C62A.1 C63A.1 C64A.1 C65A.1 C66A.1 C67A.1 C68A.1 NT2A.2 R60A.1 U10A.11 U10A.26 | length 0.8
  SIG 3 w0.203: NT2A.2@7.825,12.306 7.825,11.775 R60A.1@8,11.6
VOUTB: C62B.1 C63B.1 C64B.1 C65B.1 C66B.1 C67B.1 C68B.1 NT2B.2 R60B.1 U10B.11 U10B.26 | length 0.8
  SIG 3 w0.203: NT2B.2@89.854,11.576 89.855,11.045 R60B.1@90.03,10.87
  other v1: 92.775,3.675 91.875,3.75 90.9,3.8 89.975,3.825 91.925,5.725 90.875,5.775 92.8,5.775 90,5.8
VOUTC: C62C.1 C63C.1 C64C.1 C65C.1 C66C.1 C67C.1 C68C.1 NT2C.2 R60C.1 U10C.11 U10C.26 | length 0.8
  SIG 3 w0.203: NT2C.2@105.074,11.683 105.074,11.153 R60C.1@105.249,10.978
  other v1: 106.125,3.825 107.075,3.875 108.025,3.875 105.375,3.925 107.1,5.75 107.95,5.75 105.25,5.825 106.175,5.9
VOUTD: C62D.1 C63D.1 C64D.1 C65D.1 C66D.1 C67D.1 C68D.1 NT2D.2 R60D.1 U10D.11 U10D.26 | length 0.8
  SIG 3 w0.203: NT2D.2@178.635,19.161 178.635,18.63 R60D.1@178.81,18.455
pads on no net: J1. J1.A8 J1.B8 J3A. J3A.A8 J3A.B8 J3B. J3B.A8 J3B.B8 J3C. J3C.A8 J3C.B8 J3D. J3D.A8 J3D.B8 J6. U2.22 U2.23 U2.24 U2.25 U2.26 U2.27 U4.4 U4.12 U4.13 U4.49 U4.50 U4.51 U4.52 U4.54 U4.74 U4.80 U4.96 U4.97 U6A.1 U6A.2 U6A.14 U6A.15 U6B.1 U6B.2 U6B.14 U6B.15 U6C.1 U6C.2 U6C.14 U6C.15 U6D.1 U6D.2 U6D.14 U6D.15 U7A.1 U7A.10 U7B.1 U7B.10 U7C.1 U7C.10 U7D.1 U7D.10 U8A.18 U8A.30 U8A.31 U8A.40 U8A.41 U8A.42 U8A.43 U8A.48 U8A.49 U8A.50 U8A.53 U8A.54 U8A.55 U8B.18 U8B.30 U8B.31 U8B.40 U8B.41 U8B.42 U8B.43 U8B.48 U8B.49 U8B.50 U8B.53 U8B.54 U8B.55 U8C.18 U8C.30 U8C.31 U8C.40 U8C.41 U8C.42 U8C.43 U8C.48 U8C.49 U8C.50 U8C.53 U8C.54 U8C.55 U8D.18 U8D.30 U8D.31 U8D.40 U8D.41 U8D.42 U8D.43 U8D.48 U8D.49 U8D.50 U8D.53 U8D.54 U8D.55 U11.2 U11.3 U11.4 U11.10 U11.11 U11.14 U11.15 U11.16 U11.17 U11.18 U11.19 U11.20 U11.21 U11.22 U11.25 U11.26 U11.27 U11.28 U11.29 U11.30 U11.31 U11.38 U11.39 U11.40 U11.41 U11.45 U11.46

## Polygon pours and split planes (outlines as drawn)
P3V3 on PWR "P3V3_L04_P351" (solid, pour order 351): 190.05,64.03 190.05,0.03 0.05,0.03 0.05,64.03
P5V0 on PWR "P5V0_L04_P350" (solid, pour order 350): 101.86,47.36 101.887,47.987 101.088,48.787 100.062,48.787 97.975,46.7 97.975,32.725 100.275,32.725 100.275,45.775
VIN on PWR "VIN_L04_P349" (solid, pour order 349): 177.455,54.36 176.905,53.81 176.905,45.46 177.43,44.935 181.605,44.935 182.055,45.385 182.055,53.81 181.505,54.36
PPHVC on PWR "PPHVC_L04_P347" (solid, pour order 347): 20 vertices, not listed, extent 101.275,9.15 116.175,14.75
PPHVD on PWR "PPHVD_L04_P346" (solid, pour order 346): 173.375,51.625 173.975,51.025 173.975,20.825 176.825,20.825 177.4,20.25 177.4,16.6 176.95,16.175 171.275,16.175 170.425,17.025 170.425,49.3 168.575,49.3 168.225,49.65 168.225,51.25 168.625,51.625
PPHVA on PWR "PPHVA_L04_P344" (solid, pour order 344): 20 vertices, not listed, extent 4.125,9.575 17.925,14.85
PPHVB on PWR "PPHVB_L04_P342" (solid, pour order 342): 17 vertices, not listed, extent 63.575,8.85 89.25,25.625
VBUSB on PWR "VBUSB_L04_P341" (solid, pour order 341): 18 vertices, not listed, extent 50.3,4.7 70.75,22.75
P1V1 on PWR "P1V1_L04_P322" (solid, pour order 322): 20 vertices, not listed, extent 65.8,33.475 112.775,53.2
VIN on PWR "VIN_L04_P321" (solid, pour order 321): 23 vertices, not listed, extent 91.375,38.45 182.05,62.602
VBUSD on PWR "VBUSD_L04_P316" (solid, pour order 316): 149.113,7.233 150.013,6.333 153.713,6.333 154.413,7.033 154.413,11.433 153.613,12.233 150.013,12.233 149.113,11.333
VBUSC on PWR "VBUSC_L04_P315" (solid, pour order 315): 134.03,7.105 134.93,6.205 138.63,6.205 139.33,6.905 139.33,11.305 138.53,12.105 134.93,12.105 134.03,11.205
VBUSA on PWR "VBUSA_L04_P314" (solid, pour order 314): 35.975,7.2 36.8,6.375 40.475,6.375 41.3,7.2 41.3,11.65 40.475,12.475 36.8,12.475 35.975,11.65 23.092,11.65 21.438,13.428 21.438,22.65 18,22.65 18,7.2
VBUSC on PWR "VBUSC_L04_P292" (solid, pour order 292): 116.35,9.05 118.3,7.15 134.05,7.15 134.05,11.225 119.825,11.225 119.825,22.3 119.15,22.975 117,22.975 116.35,22.325
P3V3 on PWR "P3V3_L04_P277" (solid, pour order 277): 91.275,47.875 90.65,47.25 86.32,47.25 82.949,43.825 77.825,43.825 77.825,47.8 82.4,47.8 84.3,49.7 90.615,49.7 91.275,48.971
VBUSD on PWR "VBUSD_L04_P276" (solid, pour order 276): 164.775,51.5 165.325,52.05 167.45,52.05 168.025,51.45 168.05,51.45 168.05,8.325 166.675,6.95 150.25,6.95 150.25,11.375 164.775,11.375
P5V0 on PWR "P5V0_L04_P266" (solid, pour order 266): 159.038,42.337 159.038,48.298 161.141,50.374 161.159,51.666 160.775,52.05 159.95,52.05 156.45,48.55 156.45,43.6 146.075,33.225 123.125,33.225 123.125,30.25 146.95,30.25
P5V0 on PWR "P5V0_L04_P265" (solid, pour order 265): 48 vertices, not listed, extent 24.825,1.325 126.075,42.625
P1V1 on PWR "P1V1_L04_P313" (solid, pour order 313): 65.8,39.175 65.425,39.55 65.4,40.2 65.4,53.1 79.525,53.1 79.525,39.175
VIN on PWR "VIN_L04_P257" (solid, pour order 257): 88.675,46.775 88.125,46.225 88.125,37.875 88.65,37.35 92.825,37.35 93.275,37.8 93.275,46.225 92.725,46.775
VIN on PWR "VIN_L04_P348" (solid, pour order 348): 103.894,46.882 103.344,46.332 103.344,37.982 103.869,37.457 108.044,37.457 108.494,37.907 108.494,46.332 107.944,46.882
REG_VCCA on SIG 3 "REG_VCCA_L06_P010" (solid, pour order 240): 20 vertices, not listed, extent 4.59,16.432 7.537,19.2
GND on SIG 3 "GND_L06_P345" (solid, pour order 345): 190.05,64.03 190.05,0.03 0.05,0.03 0.05,64.03
VOUTB on SIG 3 "VOUTA_L06_P012" (solid, pour order 343): 90.557,15.093 90.151,15.093 90.151,11.566 89.566,10.982 89.566,0.234 93.148,0.234 93.199,0.284 93.199,11.181 91.878,11.181 90.557,12.502
VIN on SIG 3 "VIN_L06_P320" (solid, pour order 320): 138.725,63.25 138.725,55.225 10.925,55.225 10.925,40.675 10.6,40.35 10.55,40.4 5.875,40.4 5.875,63.25
SW1D on SIG 3 "SW1A_L06_P007" (solid, pour order 301): 17 vertices, not listed, extent 176.361,37.428 182.461,44.828
VIN on SIG 3 "VIN_L06_P006" (solid, pour order 298): 17 vertices, not listed, extent 176.416,42.428 181.461,54.328
SW1C on SIG 3 "SW1A_L06_P007" (solid, pour order 297): 17 vertices, not listed, extent 102.8,29.95 108.9,37.35
SW2D on SIG 3 "SW2A_L06_P008" (solid, pour order 289): 26 vertices, not listed, extent 175.961,21.128 182.661,30.128
SW2C on SIG 3 "SW2A_L06_P008" (solid, pour order 285): 26 vertices, not listed, extent 102.4,13.65 109.1,22.65
SW2B on SIG 3 "SW2A_L06_P008" (solid, pour order 281): 26 vertices, not listed, extent 87.181,13.543 93.881,22.543
VOUTC on SIG 3 "VOUTA_L06_P012" (solid, pour order 279): 105.776,15.2 105.369,15.2 105.369,11.999 104.785,11.415 104.785,0.341 108.367,0.341 108.417,0.392 108.417,11.288 107.097,11.288 105.776,12.609
VINUP on SIG 3 "VINUP_L06_P278" (solid, pour order 278): 146.6,53.3 131.201,53.3 125.5,47.599 125.5,43.45 132.157,43.45 134,43.45 136.793,46.495 146.6,46.495
SW2A on SIG 3 "SW2A_L06_P008" (solid, pour order 238): 28 vertices, not listed, extent 5.151,14.272 11.851,23.272
SW1A on SIG 3 "SW1A_L06_P007" (solid, pour order 237): 17 vertices, not listed, extent 5.551,30.572 11.651,37.972
GND on SIG 3 "GND_L06_P235" (solid, pour order 235): 64.1,39.1 64.1,54.4 78.6,54.4 78.6,39.1
VOUTD on SIG 3 "VOUTA_L06_P012" (solid, pour order 280): 179.337,22.678 178.931,22.678 178.931,19.477 178.347,18.893 178.347,7.819 181.928,7.819 181.979,7.869 181.979,18.766 180.658,18.766 179.337,20.087
VOUTA on SIG 3 "VOUTA_L06_P012" (solid, pour order 246): 8.527,15.822 8.121,15.822 8.121,12.296 7.537,11.712 7.537,0.963 11.118,0.963 11.169,1.014 11.169,11.911 9.848,11.911 8.527,13.231
GND on SIG 3 "GND_L06_P302" (solid, pour order 302): 9.425,15.8 10.1,15.8 cw(c10.1,15.675) 10.225,15.675 10.225,14.05 cw(c10.1,14.05) 10.1,13.925 9.95,13.925 ccw(c9.95,13.8) 9.825,13.8 9.825,12.65 9.275,12.65 8.65,13.275 8.65,14.025 cw(c8.775,14.025) 8.775,14.15 9.25,14.15 ccw(c9.25,14.275) 9.375,14.275 9.375,15.75 cw(c9.425,15.75)
GND on SIG 3 "GND_L06_P303" (solid, pour order 303): 106.674,15.178 107.349,15.178 cw(c107.349,15.053) 107.474,15.053 107.474,13.428 cw(c107.349,13.428) 107.349,13.303 107.199,13.303 ccw(c107.199,13.178) 107.074,13.178 107.074,12.028 106.524,12.028 105.899,12.653 105.899,13.403 cw(c106.024,13.403) 106.024,13.528 106.499,13.528 ccw(c106.499,13.653) 106.624,13.653 106.624,15.128 cw(c106.674,15.128)
GND on SIG 3 "GND_L06_P304" (solid, pour order 304): 91.455,15.07 92.13,15.07 cw(c92.13,14.945) 92.255,14.945 92.255,13.32 cw(c92.13,13.32) 92.13,13.195 91.98,13.195 ccw(c91.98,13.07) 91.855,13.07 91.855,11.92 91.305,11.92 90.68,12.545 90.68,13.295 cw(c90.805,13.295) 90.805,13.42 91.28,13.42 ccw(c91.28,13.545) 91.405,13.545 91.405,15.02 cw(c91.455,15.02)
GND on SIG 3 "GND_L06_P305" (solid, pour order 305): 180.235,22.655 180.91,22.655 cw(c180.91,22.53) 181.035,22.53 181.035,20.905 cw(c180.91,20.905) 180.91,20.78 180.76,20.78 ccw(c180.76,20.655) 180.635,20.655 180.635,19.505 180.085,19.505 179.46,20.13 179.46,20.88 cw(c179.585,20.88) 179.585,21.005 180.06,21.005 ccw(c180.06,21.13) 180.185,21.13 180.185,22.605 cw(c180.235,22.605)
DITHD on SIG 3 "DITHA_L06_P011" (solid, pour order 293): 181.242,20.493 181.242,20.036 ccw(c181.318,20.036) 181.318,19.96 181.774,19.96 cw(c181.774,19.527) 182.08,19.833 ccw(c182.387,20.139) 182.387,19.706 183.122,19.706 ccw(c183.122,19.858) 183.274,19.858 183.274,20.315 ccw(c183.02,20.315) 183.02,20.569 181.318,20.569 ccw(c181.318,20.493)
DITHC on SIG 3 "DITHA_L06_P011" (solid, pour order 288): 107.681,13.015 107.681,12.558 ccw(c107.757,12.558) 107.757,12.482 108.212,12.482 cw(c108.213,12.049) 108.519,12.355 ccw(c108.826,12.662) 108.826,12.228 109.56,12.228 ccw(c109.56,12.38) 109.713,12.38 109.713,12.838 ccw(c109.459,12.838) 109.459,13.092 107.757,13.092 ccw(c107.757,13.015)
DITHB on SIG 3 "DITHA_L06_P011" (solid, pour order 284): 92.462,12.908 92.462,12.451 ccw(c92.538,12.451) 92.538,12.375 92.994,12.375 cw(c92.994,11.942) 93.3,12.248 ccw(c93.607,12.554) 93.607,12.121 94.342,12.121 ccw(c94.342,12.273) 94.494,12.273 94.494,12.73 ccw(c94.24,12.73) 94.24,12.984 92.538,12.984 ccw(c92.538,12.908)
VIN on SIG 3 "VIN_L06_P006" (solid, pour order 296): 17 vertices, not listed, extent 102.855,34.95 107.9,46.85
SW1B on SIG 3 "SW1A_L06_P007" (solid, pour order 295): 17 vertices, not listed, extent 87.581,29.843 93.681,37.243
VIN on SIG 3 "VIN_L06_P006" (solid, pour order 294): 17 vertices, not listed, extent 87.636,34.843 92.681,46.743
REG_VCCD on SIG 3 "REG_VCCA_L06_P010" (solid, pour order 291): 20 vertices, not listed, extent 175.4,23.287 178.347,26.056
DR1LD on SIG 3 "DR1LA_L06_P009" (solid, pour order 290): 181.166,23.338 181.166,23.871 cw(c181.268,23.871) 181.268,23.973 182.174,23.973 cw(c182.174,23.525) 182.491,23.842 ccw(c182.665,24.015) 182.665,23.77 182.665,23.516 ccw(c182.665,23.271) 182.491,23.444 cw(c182.051,23.884) 182.051,23.262 181.242,23.262 cw(c181.242,23.338)
REG_VCCC on SIG 3 "REG_VCCA_L06_P010" (solid, pour order 287): 20 vertices, not listed, extent 101.839,15.809 104.785,18.578
DR1LC on SIG 3 "DR1LA_L06_P009" (solid, pour order 286): 107.605,15.86 107.605,16.394 cw(c107.706,16.394) 107.706,16.495 108.613,16.495 cw(c108.613,16.047) 108.93,16.364 ccw(c109.103,16.537) 109.103,16.292 109.103,16.038 ccw(c109.103,15.793) 108.93,15.966 cw(c108.49,16.406) 108.49,15.784 107.681,15.784 cw(c107.681,15.86)
REG_VCCB on SIG 3 "REG_VCCA_L06_P010" (solid, pour order 283): 20 vertices, not listed, extent 86.62,15.702 89.566,18.471
DR1LB on SIG 3 "DR1LA_L06_P009" (solid, pour order 282): 92.386,15.753 92.386,16.286 cw(c92.487,16.286) 92.487,16.388 93.394,16.388 cw(c93.394,15.94) 93.711,16.257 ccw(c93.884,16.43) 93.884,16.185 93.884,15.931 ccw(c93.884,15.686) 93.711,15.859 cw(c93.271,16.299) 93.271,15.677 92.462,15.677 cw(c92.462,15.753)
DITHA on SIG 3 "DITHA_L06_P011" (solid, pour order 241): 10.432,13.638 10.432,13.181 ccw(c10.508,13.181) 10.508,13.104 10.964,13.104 cw(c10.964,12.672) 11.27,12.977 ccw(c11.577,13.284) 11.577,12.85 12.312,12.85 ccw(c12.312,13.003) 12.464,13.003 12.464,13.46 ccw(c12.21,13.46) 12.21,13.714 10.508,13.714 ccw(c10.508,13.638)
VIN on SIG 3 "VIN_L06_P006" (solid, pour order 236): 17 vertices, not listed, extent 5.606,35.572 10.651,47.472
DR1LA on SIG 3 "DR1LA_L06_P009" (solid, pour order 239): 10.356,16.483 10.356,17.016 cw(c10.458,17.016) 10.458,17.118 11.364,17.118 cw(c11.364,16.669) 11.681,16.986 ccw(c11.855,17.16) 11.855,16.914 11.855,16.66 ccw(c11.854,16.415) 11.681,16.589 cw(c11.241,17.028) 11.241,16.406 10.432,16.406 cw(c10.432,16.483)
P3V3 on SIG 1 "P3V3_L01_P307" (solid, pour order 307): 150.988,15.983 150.538,16.958 150.538,17.483 151.163,17.483 151.436,16.737 151.956,16.737 151.956,15.983
CHASSIS on SIG 1 "CHASSIS_L01_P247" (solid, pour order 247): 54.6,55.475 54.6,52.15 54.725,52.025 54.725,50.675 54.975,50.425 55.575,50.425 55.8,50.65 55.8,55.425 55.5,55.725 54.9,55.725
GND on SIG 1 "GND_L01_P360" (solid, pour order 360): 190.05,64.03 190.05,0.03 0.05,0.03 0.05,64.03
LDO_3V3D on SIG 1 "LDO_3V3A_L01_P017" (solid, pour order 355): 36 vertices, not listed, extent 154.35,47.212 160.377,57.225
LDO_3V3C on SIG 1 "LDO_3V3C_L01_P354" (solid, pour order 354): 17 vertices, not listed, extent 114.3,5.525 116.7,8.975
LDO_3V3B on SIG 1 "LDO_3V3B_L01_P340" (solid, pour order 340): 17 vertices, not listed, extent 65.45,5.025 67.85,8.475
VBUSD on SIG 1 "VBUSD_L01_P338" (solid, pour order 338): 168.892,41.65 168.642,41.375 165.917,41.375 165.642,41.65 165.642,43.95 165.367,44.225 164.692,44.225 164.692,44.825 167.892,44.825 168.892,44.091
VBUSD on SIG 1 "NONET_L-01_P-001" (solid, pour order 337): 168.042,49.625 167.641,49.175 166.342,49.175 165.394,48.227 164.692,48.227 164.692,51.5 168.042,51.5
PPHVD on SIG 1 "NONET_L-01_P-001" (solid, pour order 336): 171.517,48.825 170.967,48.275 166.642,48.275 165.781,47.414 164.692,47.414 164.692,48.025 165.365,48.025 166.405,49.065 167.717,49.065 167.717,49.075 168.117,49.475 168.117,51.5 170.792,51.5 171.517,50.775
VBUSC on SIG 1 "VBUSC_L01_P334" (solid, pour order 334): 115.558,22.575 115.808,22.85 118.533,22.85 118.808,22.575 118.808,20.275 119.083,20 119.758,20 119.758,19.4 116.558,19.4 115.558,20.134
VBUSC on SIG 1 "NONET_L-01_P-001" (solid, pour order 333): 116.408,14.6 116.809,15.05 118.108,15.05 119.056,15.998 119.758,15.998 119.758,12.725 116.408,12.725
PPHVC on SIG 1 "NONET_L-01_P-001" (solid, pour order 332): 112.933,15.4 113.483,15.95 117.808,15.95 118.669,16.811 119.758,16.811 119.758,16.2 119.085,16.2 118.045,15.16 116.733,15.16 116.733,15.15 116.333,14.75 116.333,12.725 113.658,12.725 112.933,13.45
LDO_3V3B on SIG 1 "LDO_3V3A_L01_P017" (solid, pour order 331): 30 vertices, not listed, extent 75.05,6.5 81.25,16.513
VBUSB on SIG 1 "VBUSB_L01_P330" (solid, pour order 330): 66.708,22.075 66.958,22.35 69.683,22.35 69.958,22.075 69.958,19.775 70.233,19.5 70.908,19.5 70.908,18.9 67.708,18.9 66.708,19.634
PPHVB on SIG 1 "NONET_L-01_P-001" (solid, pour order 328): 64.083,14.9 64.633,15.45 68.958,15.45 69.819,16.311 70.908,16.311 70.908,15.7 70.235,15.7 69.195,14.66 67.883,14.66 67.883,14.65 67.483,14.25 67.483,12.225 64.808,12.225 64.083,12.95
LDO_3V3A on SIG 1 "LDO_3V3A_L01_P327" (solid, pour order 327): 17 vertices, not listed, extent 15.95,5.225 18.35,8.675
VBUSA on SIG 1 "VBUSA_L01_P326" (solid, pour order 326): 17.225,22.275 17.475,22.55 20.2,22.55 20.475,22.275 20.475,19.975 20.75,19.7 21.425,19.7 21.425,19.1 18.225,19.1 17.225,19.834
CHASSIS on SIG 1 "CHASSIS_L01_P323" (solid, pour order 323): 49.037,13.119 48.786,13.337 48.364,13.337 48.146,13.119 48.146,8.801 48.745,8.202 49.19,8.202 49.466,8.478 49.466,9.56 49.037,10.177
CHASSIS on SIG 1 "CHASSIS_L01_P319" (solid, pour order 319): 34.762,13.111 34.511,13.329 34.089,13.329 33.871,13.111 33.871,8.793 34.47,8.194 34.915,8.194 35.191,8.47 35.191,9.552 34.762,10.169
CHASSIS on SIG 1 "CHASSIS_L01_P318" (solid, pour order 318): 132.687,12.871 132.436,13.089 132.014,13.089 131.796,12.871 131.796,8.553 132.395,7.954 132.84,7.954 133.116,8.23 133.116,9.312 132.687,9.929
P5V0 on SIG 1 "P5V0_L01_P312" (solid, pour order 312): 100.45,48.9 99.525,47.975 99.525,47.556 101.581,45.5 103.975,45.5 104.125,45.65 104.125,46.7 103.975,46.85 102.981,46.85 100.931,48.9
P3V3 on SIG 1 "P3V3_L01_P311" (solid, pour order 311): 90.036,49.408 89.111,48.483 89.111,48.064 91.167,46.008 93.561,46.008 93.711,46.158 93.711,47.208 93.561,47.358 92.567,47.358 90.517,49.408
NetR73_2 on SIG 1 "NETR73_2_L01_P310" (solid, pour order 310): 100.445,60.207 100.47,60.232 101.495,60.232 101.495,59.407 101.895,59.007 102.595,59.007 102.595,58.356 102.32,58.082 100.395,58.082
NetC92_1 on SIG 1 "NETC92_1_L01_P268" (solid, pour order 268): 120.297,56.989 120.345,57.037 120.89,57.037 120.89,55.598 121.386,55.102 123.599,55.102 123.599,53.614 123.612,53.602 123.454,53.444 119.232,53.444 119.232,55.029 119.45,55.247 120.297,55.247
NetC82_1 on SIG 1 "NETC82_1_L01_P267" (solid, pour order 267): 109.7,56.8 110.3,56.8 110.4,56.7 110.4,55.5 110.798,55.102 113.058,55.102 113.058,54.158 112.344,53.444 108.856,53.444 108.691,53.609 108.691,54.891 108.902,55.102 109.6,55.102 109.6,56.7
NetC95_1 on SIG 1 "NETC95_1_L01_P264" (solid, pour order 264): 114.27,48.3 114.717,48.747 115.498,49.528 122.482,49.528 122.482,52.16 122.254,52.388 118.639,52.388 118.639,53.055 117.972,53.722 112.83,53.739 112.83,48.55 113.075,48.3
NetC85_1 on SIG 1 "NETC85_1_L01_P263" (solid, pour order 263): 102.289,53.739 102.289,48.036 102.491,47.834 104.176,47.834 104.176,48.747 104.957,49.528 111.941,49.528 111.941,52.16 111.713,52.388 108.098,52.388 108.098,53.055 107.431,53.722
NetC90_1 on SIG 1 "NETC90_1_L01_P262" (solid, pour order 262): 91.875,53.866 91.875,48.163 92.077,47.961 93.762,47.961 93.762,48.874 94.543,49.655 101.527,49.655 101.527,52.287 101.299,52.515 97.684,52.515 97.684,53.182 97.017,53.849
NetC87_1 on SIG 1 "NETC87_1_L01_P260" (solid, pour order 260): 99.342,57.116 99.39,57.164 99.935,57.164 99.935,55.725 100.431,55.229 102.644,55.229 102.644,53.844 102.371,53.571 98.429,53.571 98.277,53.723 98.277,55.156 98.495,55.374 99.342,55.374
P1V1 on SIG 1 "P1V1_L01_P252" (solid, pour order 252): 110.991,49.535 110.066,48.61 110.066,48.191 112.122,46.135 114.516,46.135 114.666,46.285 114.666,47.335 114.516,47.485 113.522,47.485 111.472,49.535
VOUTC on SIG 1 "VOUTC_L01_P244" (solid, pour order 244): 104.675,5.675 cw(c105.4,5.675) 105.4,6.4 107.825,6.4 cw(c107.825,5.675) 108.55,5.675 108.55,3.9 cw(c107.925,3.9) 107.925,3.275 105.425,3.275 cw(c105.425,4.025) 104.675,4.025
P3V3 on SIG 1 "P3V3_L01_P258" (solid, pour order 258): 77.584,41.7 77.25,41.7 77.25,41.3 67.275,41.3 67.275,41.675 66.9,41.675 66.9,51.325 67.3,51.325 67.3,51.925 77.2,51.925 77.288,51.687 77.584,51.6
VOUTB on SIG 1 "VOUTB_L01_P245" (solid, pour order 245): 89.4,5.6 cw(c90.125,5.6) 90.125,6.325 92.55,6.325 cw(c92.55,5.6) 93.275,5.6 93.275,3.825 cw(c92.65,3.825) 92.65,3.2 90.15,3.2 cw(c90.15,3.95) 89.4,3.95
C_CC2D on SIG 1 "C_CC2D_L01_P359" (solid, pour order 359): 152.65,16.758 152.65,16.658 153.65,15.658 153.75,15.658 153.75,16.083 153.075,16.758
LDO_3V3D on SIG 1 "LDO_3V3D_L01_P339" (solid, pour order 339): 17 vertices, not listed, extent 167.767,55.25 170.167,58.7
LDO_3V3C on SIG 1 "LDO_3V3A_L01_P017" (solid, pour order 335): 30 vertices, not listed, extent 123.947,7.047 130.147,17.06
VBUSB on SIG 1 "NONET_L-01_P-001" (solid, pour order 329): 67.558,14.1 67.959,14.55 69.258,14.55 70.206,15.498 70.908,15.498 70.908,12.225 67.558,12.225
PPHVA on SIG 1 "NONET_L-01_P-001" (solid, pour order 248): 14.6,15.1 15.15,15.65 19.475,15.65 20.336,16.511 21.425,16.511 21.425,15.9 20.752,15.9 19.712,14.86 18.4,14.86 18.4,14.85 18,14.45 18,12.425 15.325,12.425 14.6,13.15
VBUSA on SIG 1 "NONET_L-01_P-001" (solid, pour order 249): 18.075,14.3 18.476,14.75 19.775,14.75 20.723,15.698 21.425,15.698 21.425,12.425 18.075,12.425
LDO_3V3A on SIG 1 "LDO_3V3A_L01_P017" (solid, pour order 253): 28 vertices, not listed, extent 25.55,6.7 31.75,16.713
P3V3 on SIG 1 "P3V3_L01_P250" (solid, pour order 250): 150.875,24.983 150.8,24.908 150.8,22.383 151.125,22.033 151.125,20.883 151.375,20.883 151.375,22.033 151.525,22.308 151.525,23.833 151.65,23.958 151.65,24.908 151.575,24.983